# Altium PCB amplifier sp ref.PcbDoc
Units mil, origin at the board's own origin, x right, y up, seen from the top; angles counter-clockwise.
Board outline 708.66 x 1338.58 mil, 2 copper layers (Top Layer, Bottom Layer); 34 components, 57 nets, 89 pads, 0 vias.
Unrouted connection lines stored in the file: 58.
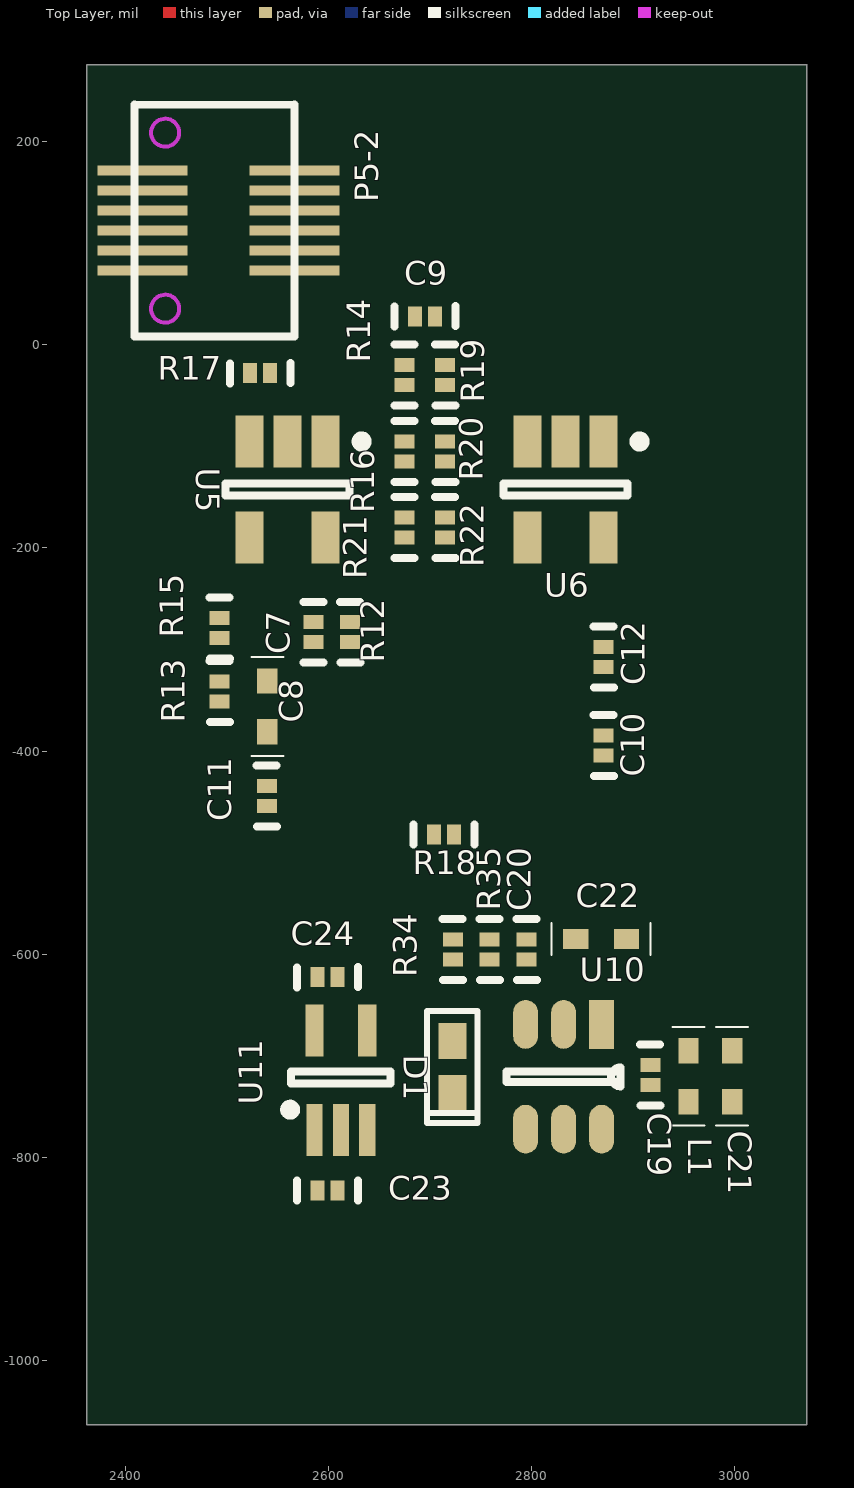
[diagram p0: Top Layer view]
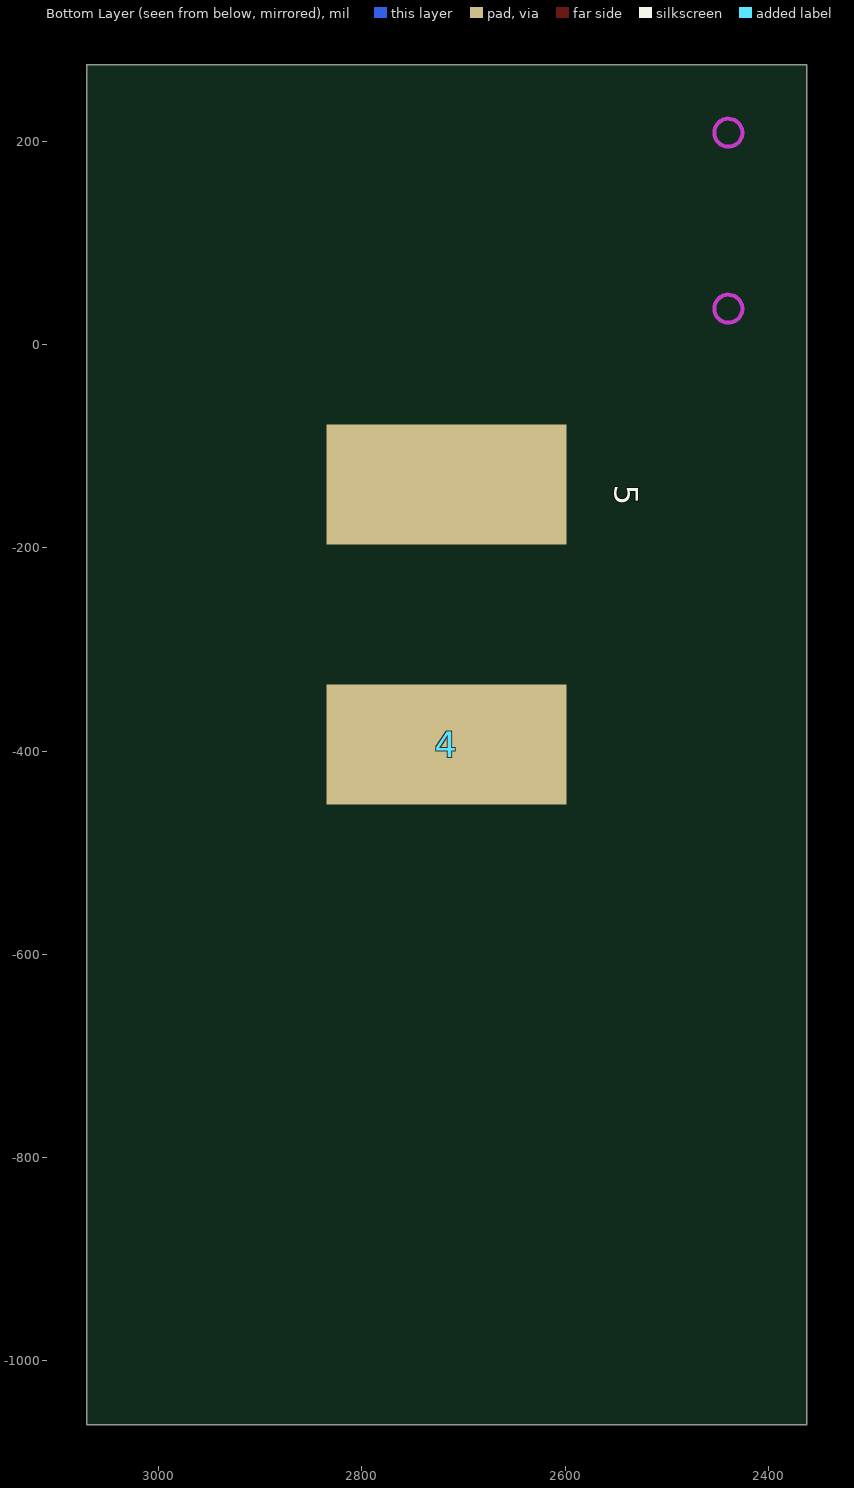
[diagram p1: Bottom Layer view, seen from below]

## Layer stack, top to bottom
Top Layer: signal copper 1.4
Dielectric: dielectric 12.6, FR-4, Dk 4.8
Bottom Layer: signal copper 1.4

## Board outline
2362.2,-1062.99 2362.2,275.59 3070.87,275.59 3070.87,-1062.99 2362.2,-1062.99

## Design rules (kind name [scope] priority, off if disabled: settings)
AssemblyTestPointUsage [All] p1 off:
AssemblyTestpoint [All] p1 off: testpointundercomponent=TRUE minsize=40 maxsize=100 preferedsize=60 minholesize=0 maxholesize=40 preferedholesize=32 testpointgrid=1 usegrid=TRUE gridtolerance=0.01 allowsidetop=TRUE allowsidebottom=TRUE
Clearance Clearance_1 [InPolygon] p1: gap=12
Clearance [All] p2: gap=5
ComponentClearance [All] p1 off: gap=10 collisioncheckmode=3 verticalgap=10 showdistances=FALSE
DiffPairsRouting [All] p1 off: maxlimit=10 minlimit=10 mostfreqgap=10 maxuncoupledlength=500
FabricationTestPointUsage [All] p1 off: valid=0 allowmultiple=FALSE
FabricationTestpoint [All] p1 off: side=3 testpointundercomponent=TRUE minsize=40 maxsize=100 preferedsize=60 minholesize=0 maxholesize=40 preferedholesize=32 testpointgrid=1 allowsidetop=TRUE allowsidebottom=TRUE usegrid=TRUE gridtolerance=0.01
FanoutControl Fanout_BGA [IsBGA] p1 off: bgadir=Out bgaviamode=Centered fanoutstyle=Auto fanoutdirection=Alternating viagrid=1 // Fanout_BGA (Default Rule)
FanoutControl Fanout_LCC [IsLCC] p2 off: bgadir=Out bgaviamode=Centered fanoutstyle=Auto fanoutdirection=Alternating viagrid=1 // Fanout_LCC (Default Rule)
FanoutControl Fanout_SOIC [IsSOIC] p3 off: bgadir=Out bgaviamode=Centered fanoutstyle=Auto fanoutdirection=Alternating viagrid=1 // Fanout_SOIC (Default Rule)
FanoutControl Fanout_Small [(CompPinCount < 5)] p4 off: bgadir=Out bgaviamode=Centered fanoutstyle=Auto fanoutdirection=OutThenIn viagrid=1 // Fanout_Small (Default Rule)
FanoutControl Fanout_Default [All] p5 off: bgadir=Out bgaviamode=Centered fanoutstyle=Auto fanoutdirection=Alternating viagrid=1 // Fanout_Default (Default Rule)
Height [All] p1 off: minheight=0 maxheight=1000 prefheight=500
HoleSize [All] p1 off: absolutevalues=TRUE maxlimit=100 minlimit=1 maxpercent=80.000 minpercent=20.000
HoleToHoleClearance [All] p1 off: gap=10 allowstackedmicrovias=TRUE
LayerPairs [All] p1 off: enforce=TRUE
MinimumSolderMaskSliver [All] p1 off: minsoldermaskwidth=10
NetAntennae [All] p1 off: netantennaetolerance=0
PasteMaskExpansion [All] p1 off: expansion=0
PlaneClearance [All] p1 off: clearance=20
PlaneConnect [All] p1 off: planeconnectstyle=Relief reliefexpansion=20 reliefentries=4 reliefconductorwidth=10 reliefairgap=10
PolygonConnect PolygonConnect_1 [(InPadClass('All Pads'))] p1: connectstyle=Relief reliefconductorwidth=8 reliefentries=4 polygonreliefangle="90 Angle"
PolygonConnect [All] p2: connectstyle=Direct reliefconductorwidth=10 reliefentries=4 polygonreliefangle="90 Angle"
RoomDefinition 3TD-FPC [InComponentClass('3TD-FPC')] p1 off: confinementstyle=ConfineIn formatcopy=TRUE lockcomponents=FALSE outline -67078.74,-39625.98 -65078.74,-39625.98 -65078.74,-38625.98 -67078.74,-38625.98
RoutingCorners [All] p1 off: cornerstyle=45-Degree minsetback=100 maxsetback=100
RoutingLayers [All] p1 off: top layer_v5=TRUE bottom layer_v5=TRUE
RoutingPriority [All] p1 off: routingpriority=0
RoutingTopology [All] p1 off: topology=Shortest
RoutingVias [All] p1: holewidth=12 width=24 viastyle="Through Hole" minholewidth=12 minwidth=24 maxholewidth=12 maxwidth=24
SilkToSilkClearance [All] p1 off: silktosilkclearance=10
SilkscreenOverComponentPads [All] p1 off: minsilkscreentomaskgap=10
SolderMaskExpansion [All] p1 off: expansion=4
Width [All] p1: maxlimit=50 minlimit=8 preferedwidth=8
2 further rules are at their usual default settings.

## Components (designator, comment, footprint, x,y, rotation, side; value= is the part's Value field where it differs from the comment)
4 "Electrode" DJP 2716.54,-393.7 r270 bottom
5 "Electrode" DJP 2716.54,-137.8 r270 bottom locked
C7 "" 0201 2585.5,-283 r90 top
C8 "" "0402 - MI" 2540,-331 r270 top
C9 "" 0201 2695,28 r0 top
C10 "" 0201 2871,-394.5 r270 top
C11 "" 0201 2539.5,-444 r270 top
C12 "" 0201 2871,-307.5 r270 top
C19 "Cap Semi" 0201 2917,-719 r270 top
C20 "Cap Semi" 0201 2795.15,-595.24 r90 top
C21 "Cap Semi" "0402 - MI" 2997.5,-695 r270 top
C22 "Cap Semi" "0402 - MI" 2843.5,-585 r0 top
C23 "" 0201 2599,-832.5 r180 top
C24 "" 0201 2599,-622.5 r180 top
D1 "Diode" D0402 2722,-711 r270 top
L1 "Res3" "0402 - MI" 2954.5,-745 r90 top
P5-2 "Header 2 * 6" btb0.5*12top 2488.19,122.05 r90 top locked
R12 "" 0201 2621.5,-283 r90 top
R13 "" 0201 2493,-341.5 r90 top
R14 "" 0201 2675,-30 r90 top
R15 "" 0201 2493,-279 r90 top
R16 "" 0201 2675,-105 r90 top
R17 "" 0201 2533,-28 r180 top
R18 "" 0201 2714,-482 r0 top
R19 "" 0201 2715,-30 r270 top
R20 "" 0201 2715,-105 r90 top
R21 "" 0201 2675,-180 r90 top
R22 "" 0201 2715,-180 r270 top
R34 "" 0201 2722.5,-595.24 r90 top
R35 "" 0201 2758.82,-595.24 r270 top
U5 "" SOT23-5AM 2560,-142.5 r270 top
U6 "" SOT23-5AM 2833.5,-142.5 r270 top
U10 "" LT3843 2827.97,-720.97 r270 top
U11 "" SC-70-5 2612.41,-724.03 r90 top

## Footprints (in the part's own frame and the unit in brackets; to place one, negate y for a bottom-side part, rotate by r counter-clockwise, add the part's x,y. Pads: shape width x height; smd on the part's side, far side on the other; paste and mask are expansions set on the pad)
0201 [mm]
  rect 0.35x0.5 smd: 1(-0.25,0) 2(0.25,0)
  silkscreen extent -0.76,-0.25 0.76,0.25
"0402 - MI" [mil]
  rect 25x20 smd: 1(0,0) 2(50,0)
  silkscreen extent -24,-16 74,16
btb0.5*12top [mm]
  rect 0.25x2.25 smd: 1(-1.25,1.8) 2(-0.75,1.8) 3(-0.25,1.8) 4(0.25,1.8) 5(0.75,1.8) 6(1.25,1.8) 7(1.25,-2) 8(0.75,-2) 9(0.25,-2) 10(-0.25,-2) 11(-0.75,-2) 12(-1.25,-2)
  Keep-Out Layer circle w0.1: c2.2,1.24 r0.35
  Keep-Out Layer circle w0.1: c-2.2,1.24 r0.35
  silkscreen extent -2.9,-2 2.9,2.01
D0402 [mm]
  rect 0.9x0.7 smd: 1(-0.65,0) 2(0.65,0)
  silkscreen extent -1.4,-0.64 1.4,0.64
DJP [mm] "12*5mm"
  rect 3x6 smd: 1(0,0)
LT3843 [mm]
  rect 1.22x0.62 smd: 1(-1.321,1.041)
  oval 1.22x0.62 smd: 2(-1.321,0.091) 3(-1.321,-0.859) 4(1.299,-0.859) 5(1.299,0.091) 6(1.299,1.041)
  silkscreen extent -0.25,-1.33 0.23,1.52
SC-70-5 [mil]
  rect 51.18x16 smd: 1(-49,26) 2(-49,0) 3(-49,-26)
  rect 51.18x18 smd: 4(49,-26) 5(49,26)
  silkscreen extent -34,-49 9,55
SOT23-5AM [mm] "SOT23, 5-Leads, Body 2.9x1.7mm, Pitch 0.95mm, Lead Span 2.8mm, IPC Low Density"
  rect 1.3x0.7 smd: 1(-1.2,0.95) 2(-1.2,0) 3(-1.2,-0.95) 4(1.2,-0.95) 5(1.2,0.95)
  silkscreen extent -1.32,-1.55 0.15,1.98, body extent -0.9,-1.55 0.9,1.55, height 1.45

## Part data
C7 C8 C9 C10 C11 C12 C23 C24: library part Cap, "Capacitor"
C19 C20 C21 C22: "Capacitor (Semiconductor SIM Model)"
D1: "Default Diode"
L1: "Resistor"
P5-2: library part "Header 12", "Header, 12-Pin"
R12 R13 R14 R15 R16 R17 R18 R19 R20 R21 R22 R34 R35: library part Res2, "Resistor"
U5 U6: library part AD8603
U10: library part LT3483
U11: library part "RT9013 SOT235"

## Nets (pads, with @x,y where several pads share a name; then routed paths per layer and width w, separated by ;. In a path a pad name is that pad's centre, name@x,y a point inside that pad or via, vN(x,y) a via of type N, cw(c..) or ccw(c..) an arc to the next point about the centre after c; other vN are vias at no path point)
+1.8V: C11.1 C24.2 R20.1 U5.5 U11.5
+3.3V: C21.2 C23.2 L1.1 P5-2.10 U6.5 U10.4 U10.6 U11.1 U11.3
+3.7V: P5-2.12
-1.8V: C12.2 C20.2 C22.1 R34.2 R35.1 U5.2
GND: 4.1 C7.2 C9.1 C11.2 C12.1 C21.1 C22.2 C23.1 C24.1 P5-2.1 P5-2.11 R12.2 R13.1 R17.1 R21.2 U6.2 U10.2 U11.2
Net2_1: 
Net3_1: 
Net5_1: 5.1 C10.1
Net6_1: C10.2
Net8_1: 
Net9_1: 
NetC1_1: 
NetC2_1: 
NetC2_2: 
NetC3_2: 
NetC7_1: C7.1 R12.1
NetC8_1: C8.1 R13.2 R15.1
NetC8_2: C8.2
NetC9_2: C9.2 R14.2 R19.1
NetC13_1: 
NetC14_1: 
NetC14_2: 
NetC15_2: 
NetC19_1: C19.1 L1.2 U10.1
NetC19_2: C19.2 D1.2 U10.5
NetC20_1: C20.1 R35.2 U10.3
NetD1_1: D1.1 R34.1
NetR3_1: 
NetR4_2: 
NetR6_2: 
NetR7_1: 
NetR7_2: 
NetR8_2: 
NetR10_1: 
NetR14_1: R14.1 R16.2 U5.1
NetR15_2: R15.2 R16.1 U5.4
NetR17_2: R17.2 U5.3
NetR18_1: R18.1
NetR18_2: R18.2
NetR19_2: R19.2 R20.2 U6.3
NetR21_1: R21.1 R22.2 U6.4
NetR25_1: 
NetR26_2: 
NetR28_2: 
NetR29_1: 
NetR29_2: 
NetR30_2: 
NetR32_1: 
NTC6: 
V1: P5-2.9
V2: P5-2.8 R22.1 U6.1
V3: P5-2.7
V4: P5-2.6
V5: P5-2.5
V6: P5-2.4
V7: P5-2.3
V8: P5-2.2
pads on no net: U11.4